# Altium PCB PCB2.PcbDoc
Units mm, origin at the board's own origin, x right, y up, seen from the top; angles counter-clockwise.
Board outline 40 x 45.09 mm, 4 copper layers (Top Layer, GROUND, POWER, Bottom Layer), stack 0.603 mm thick; 37 components, 36 nets, 160 pads, 19 vias.
Unrouted connection lines stored in the file: 3.
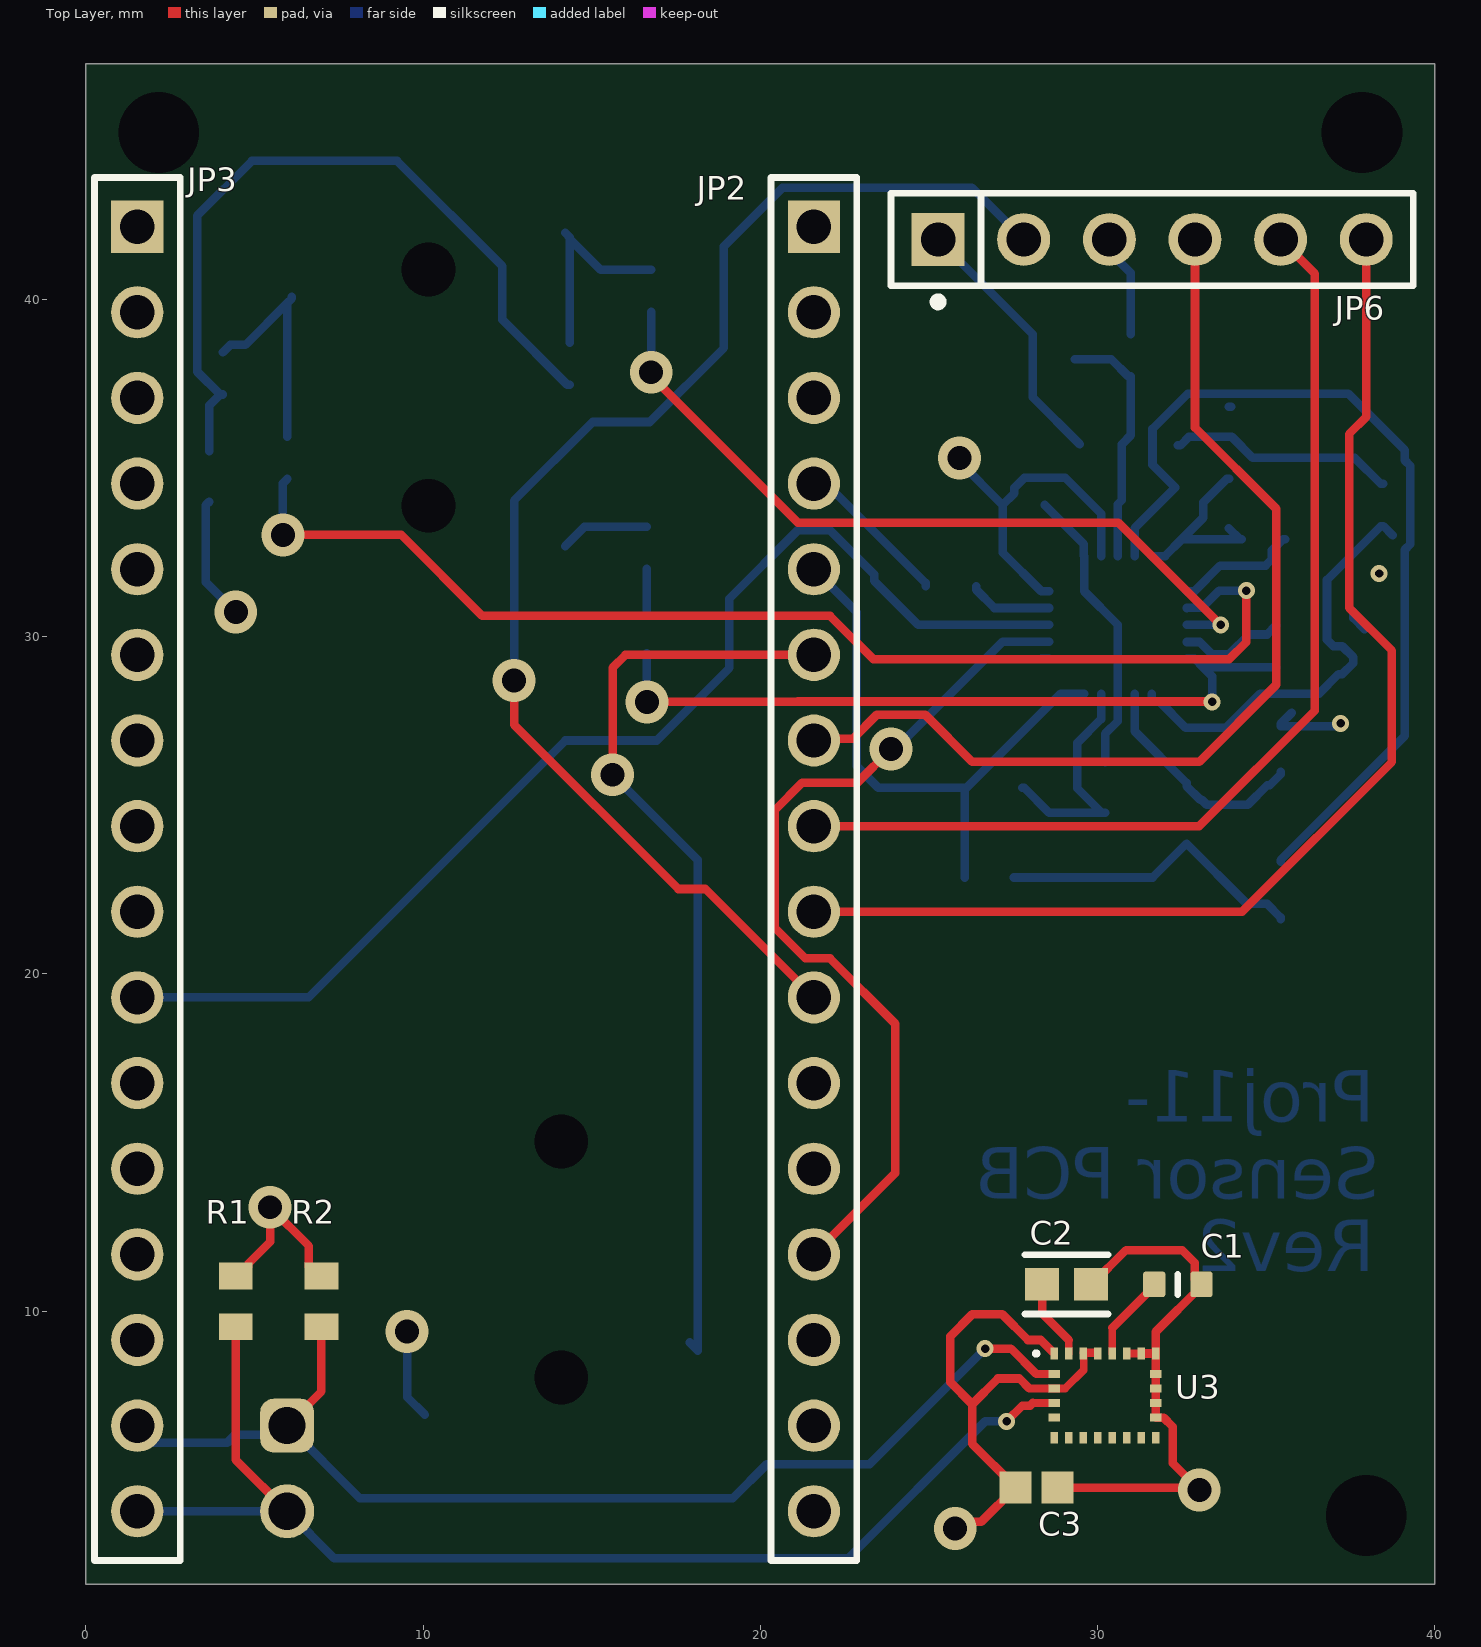
[diagram p0: Top Layer view]
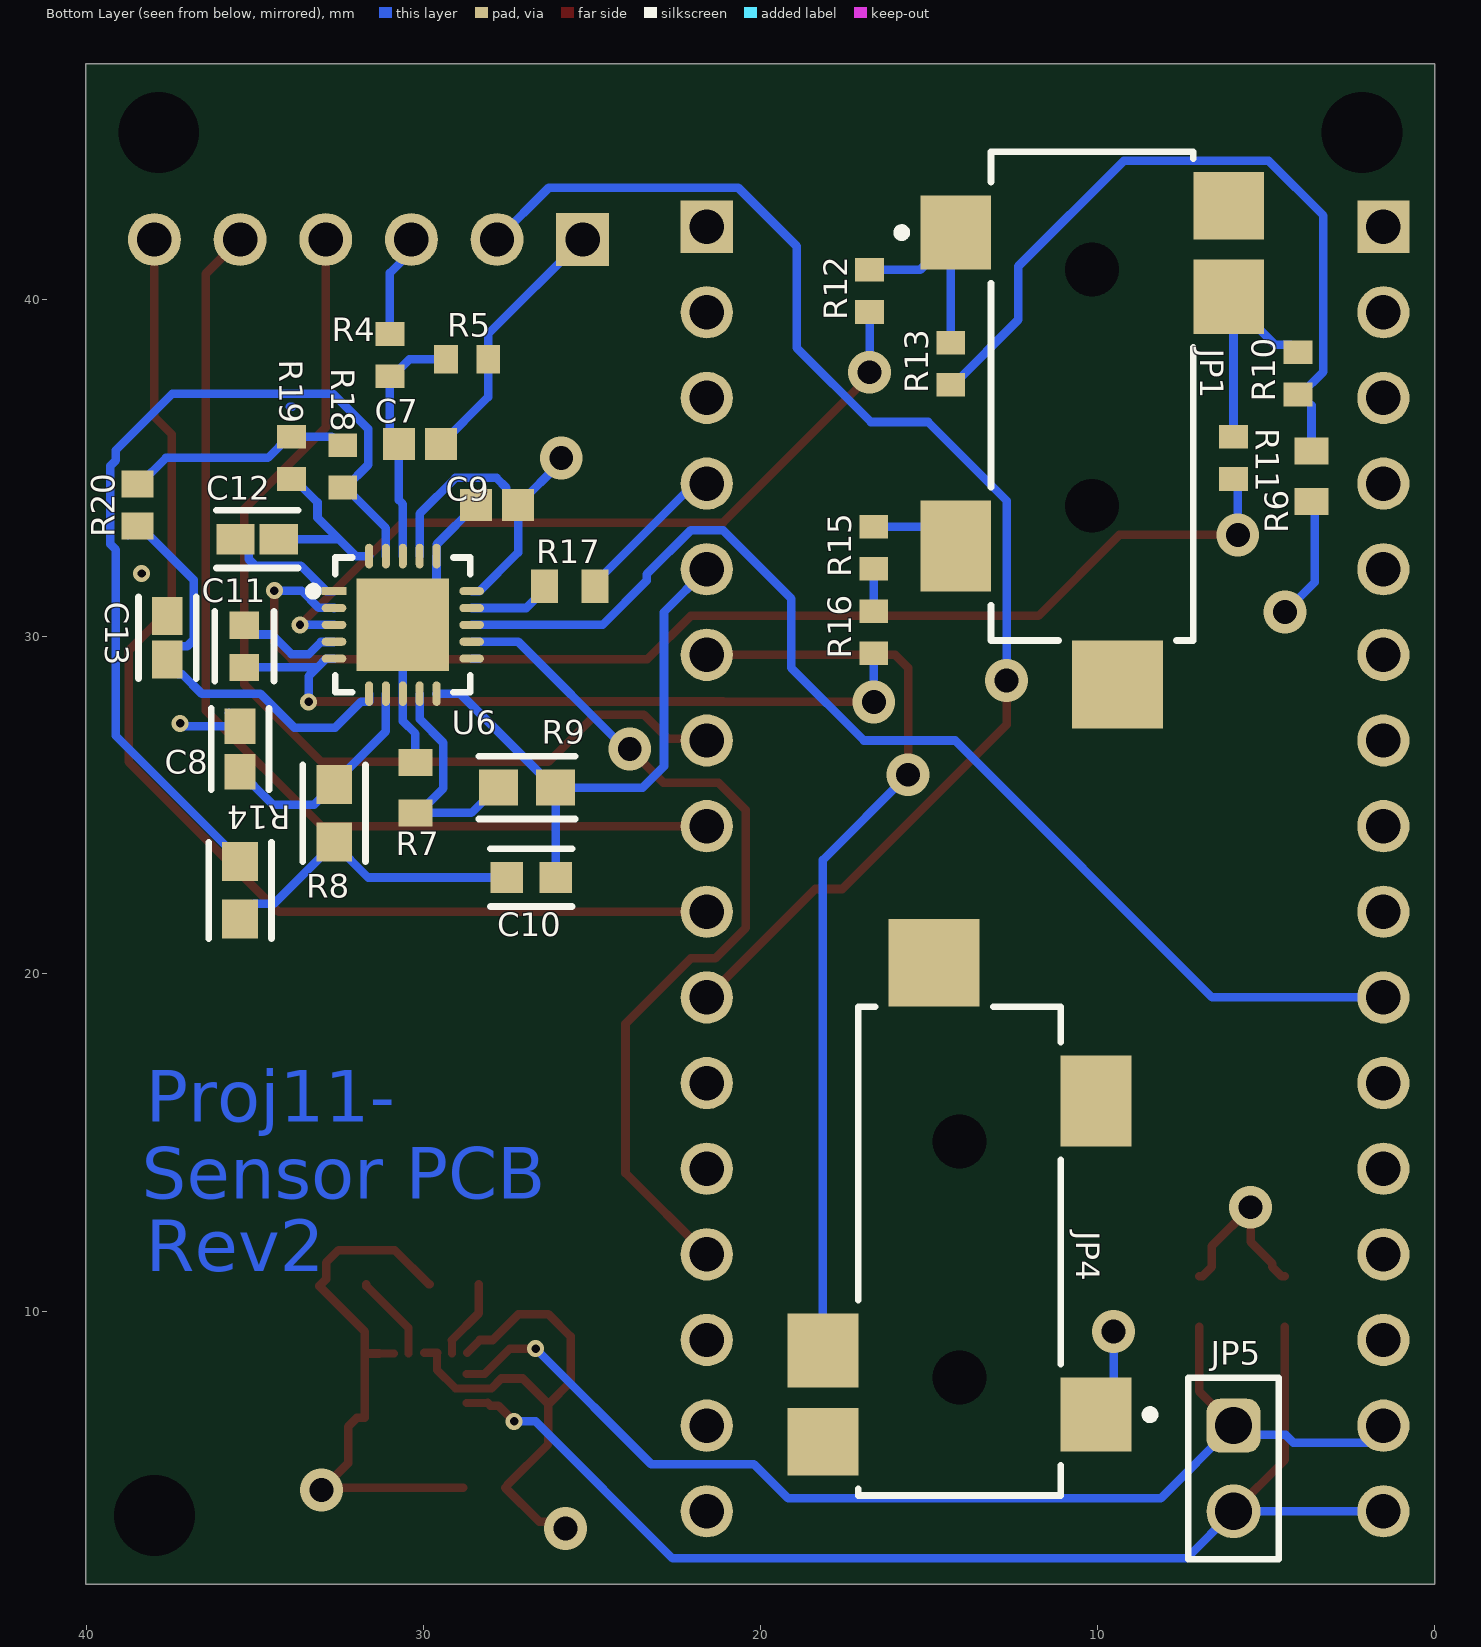
[diagram p1: Bottom Layer view, seen from below]
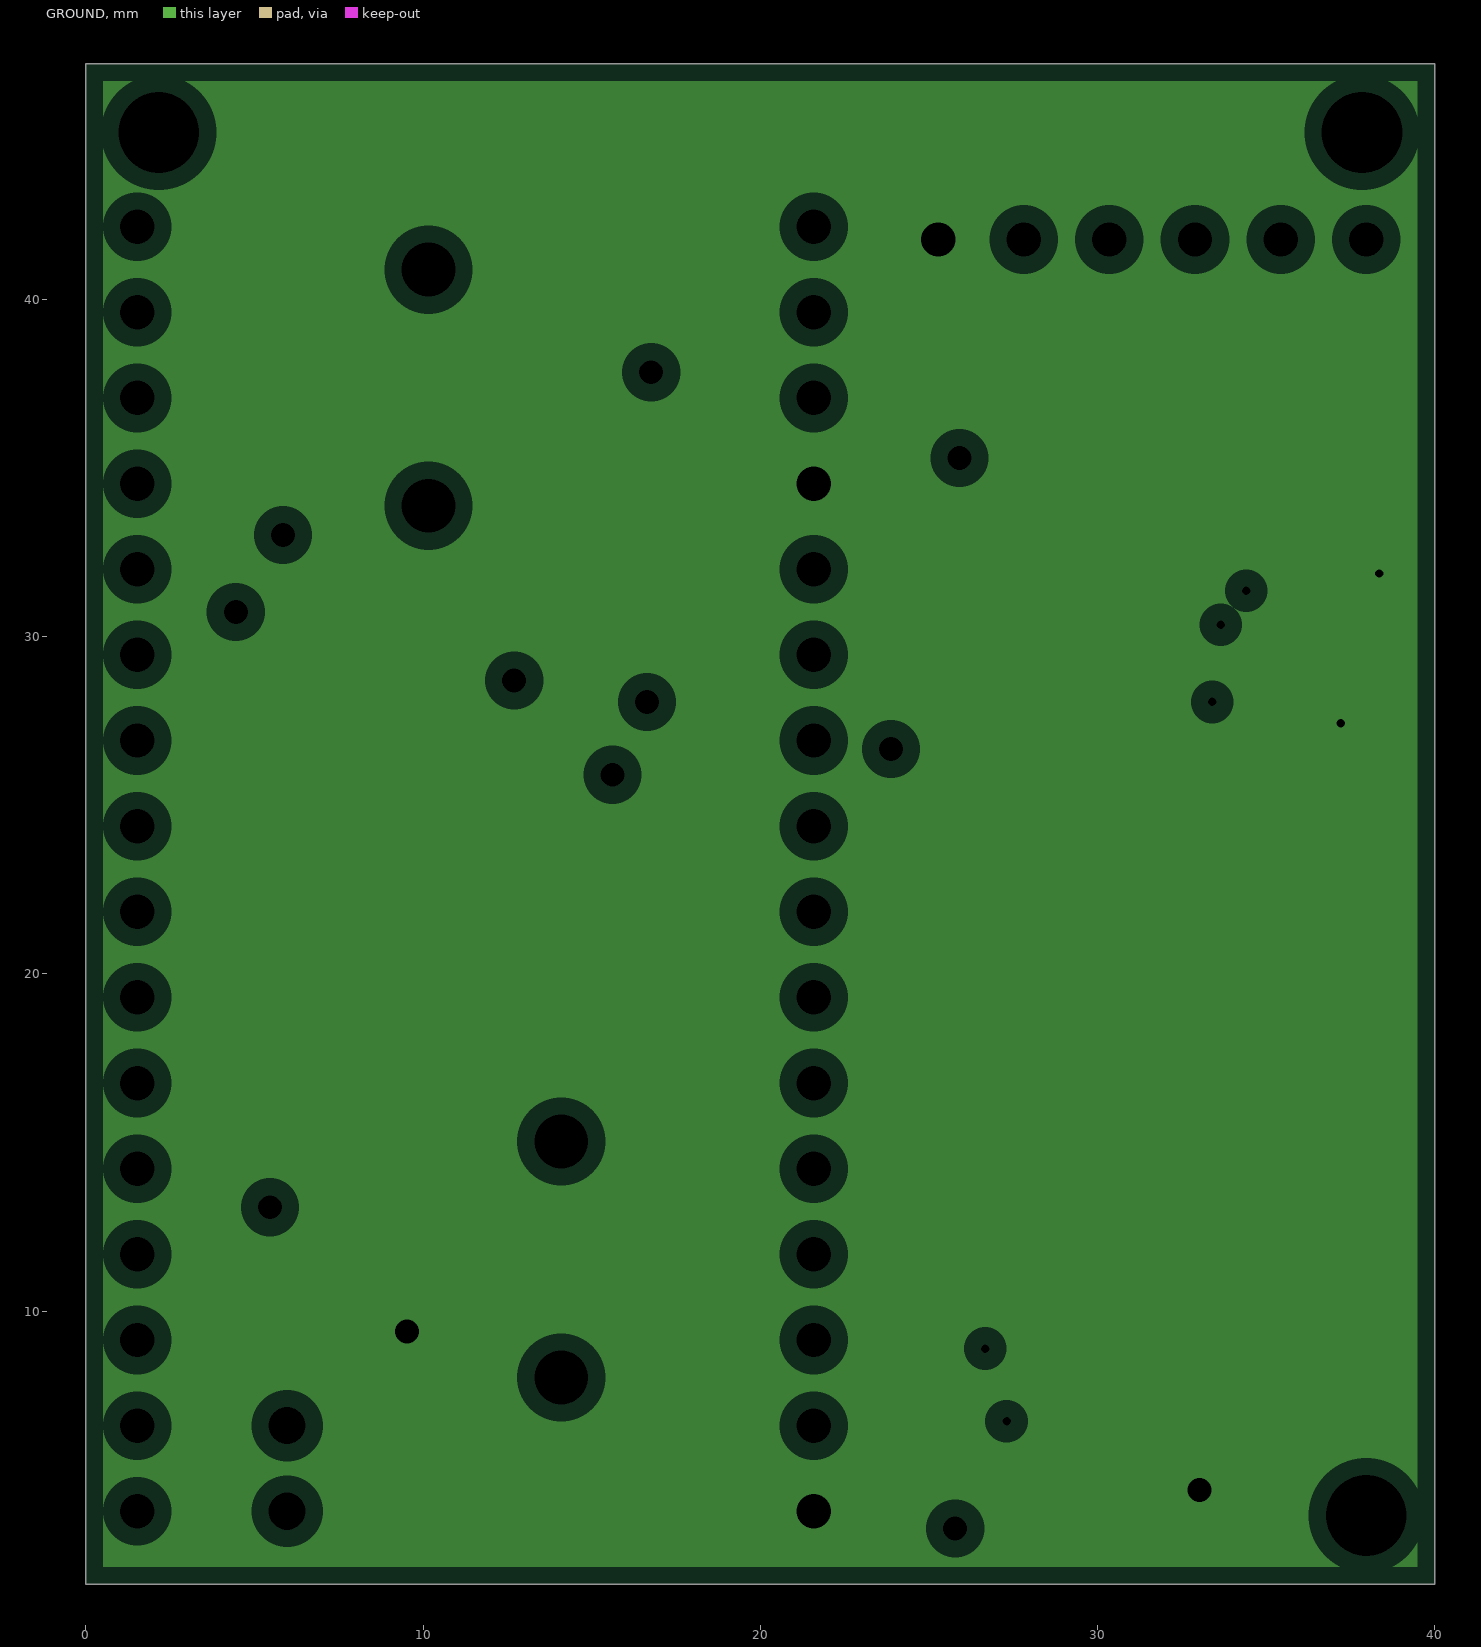
[diagram p2: GROUND, clearances drawn from the general rule]
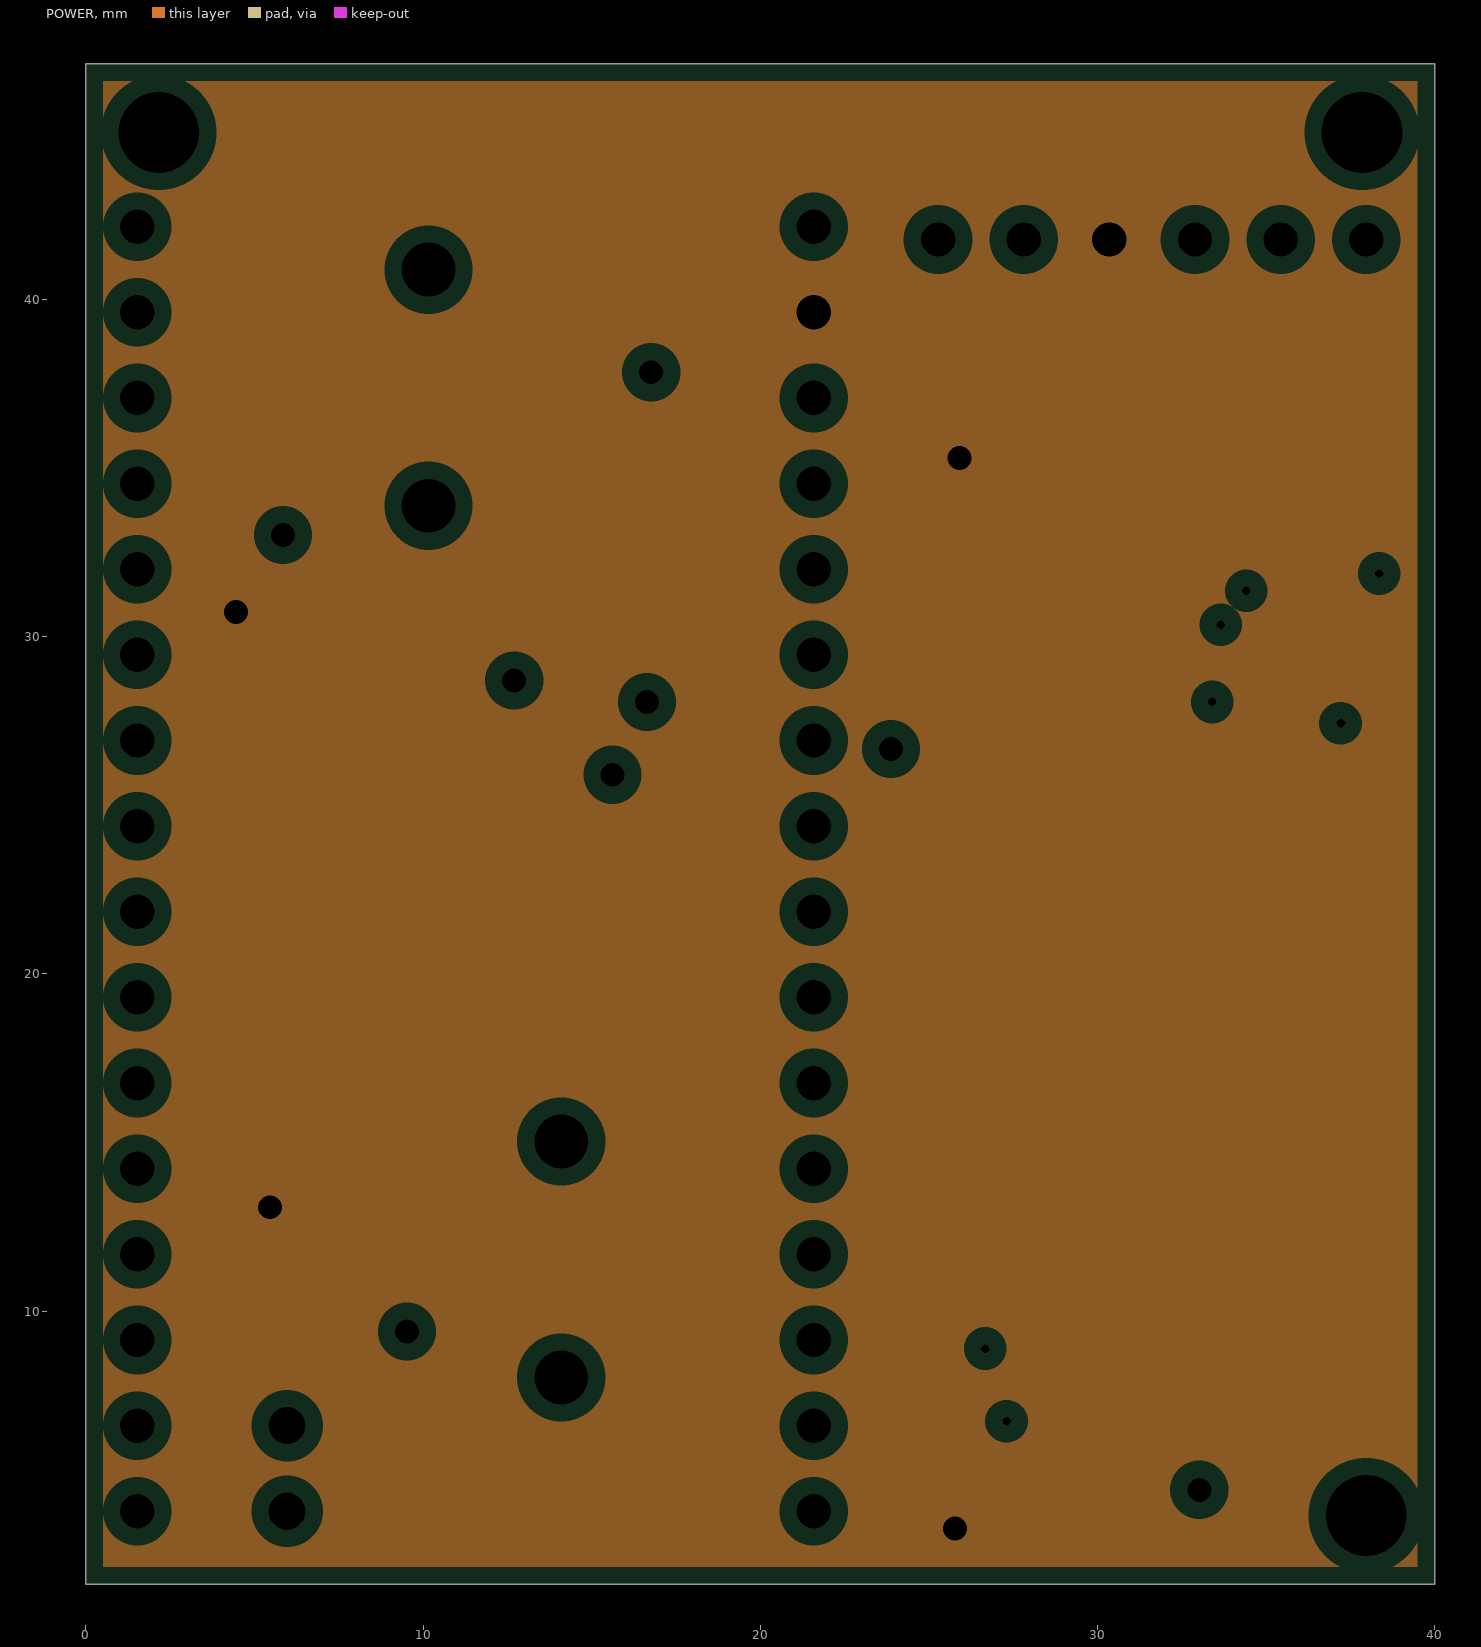
[diagram p3: POWER, clearances drawn from the general rule]
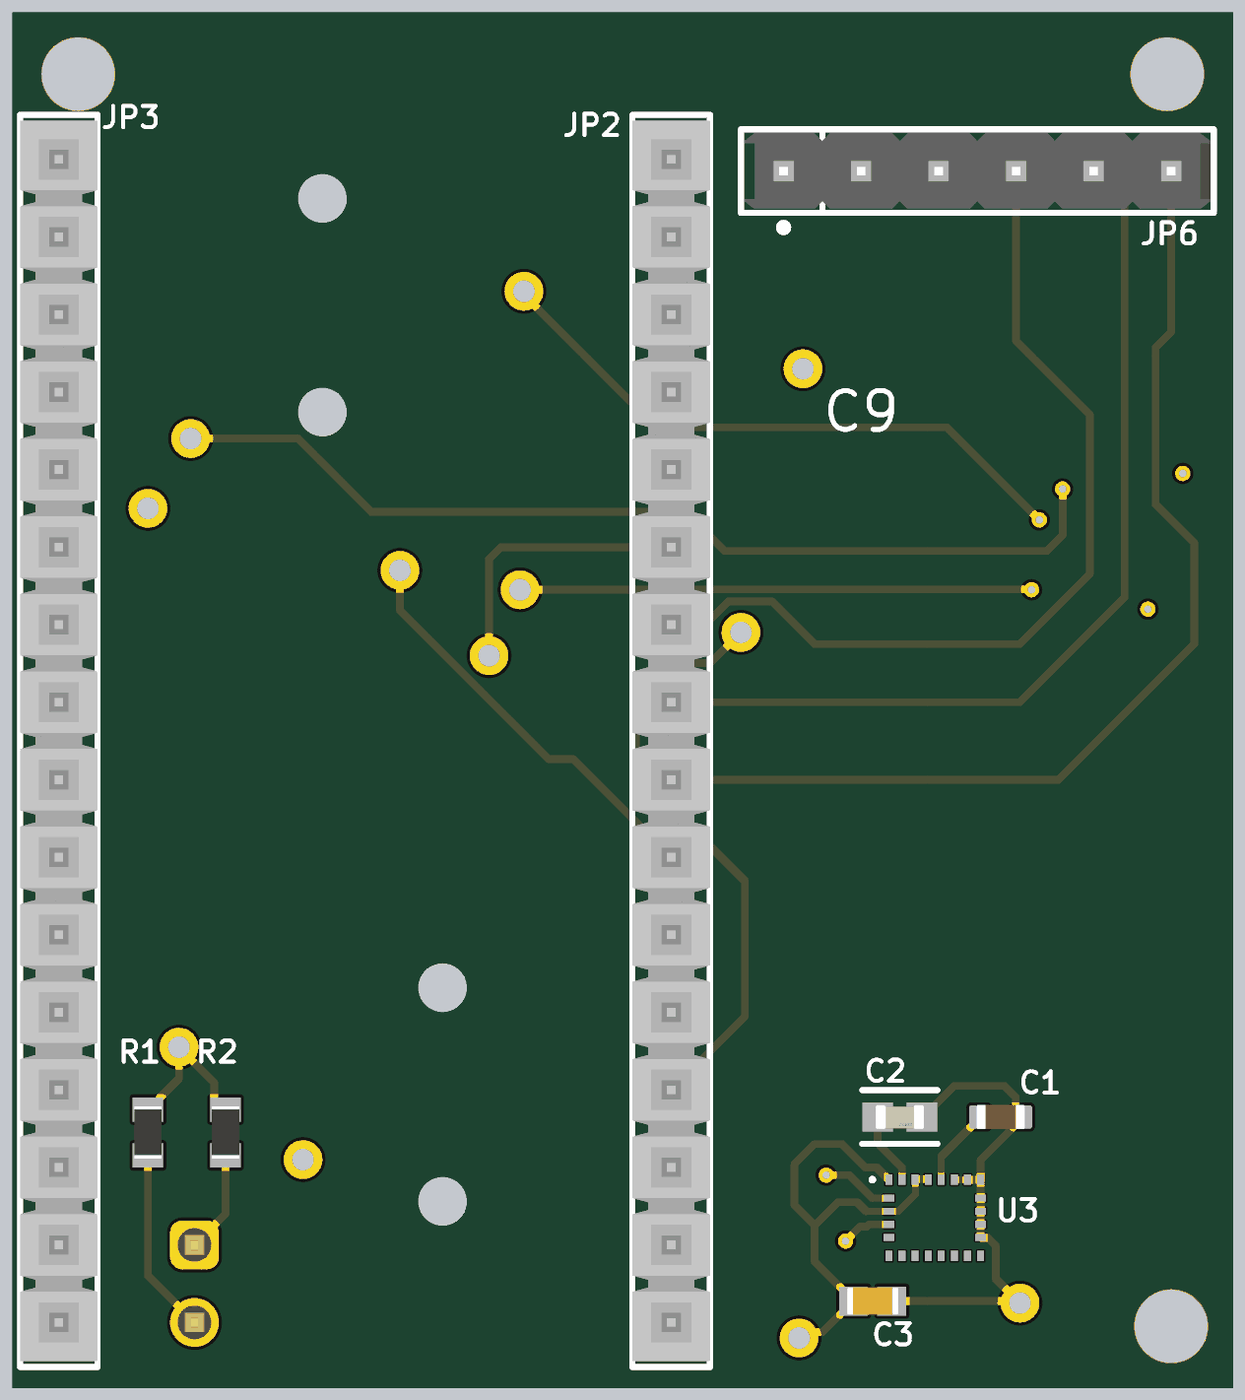
[diagram p4: 3D render of the assembled board from above, using the file's embedded part models]
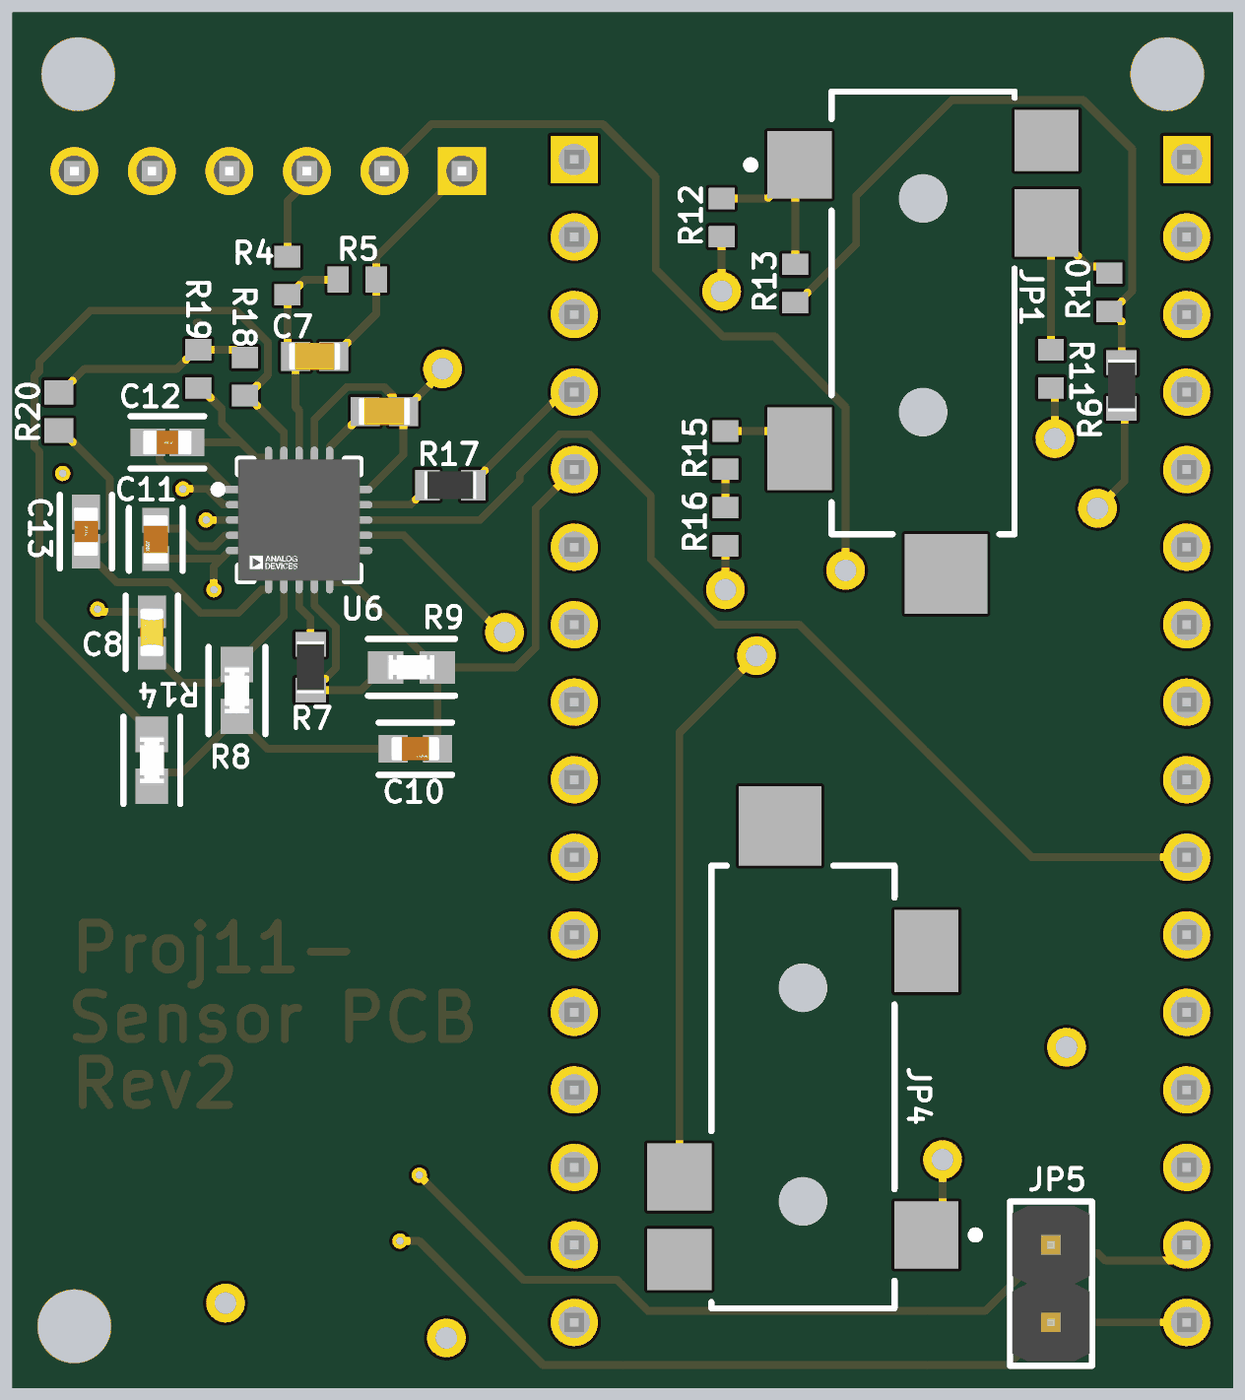
[diagram p5: 3D render of the assembled board from below, using the file's embedded part models]

## Layer stack, top to bottom
Top Solder: solder mask 0.0102, Solder Resist, Dk 3.5
Top Layer: signal copper 0.0356
Dielectric 2: prepreg 0.0711, PP-006, Dk 4.1
GROUND: plane copper 0.035, net GND
Dielectric 1: dielectric 0.32, FR-4, Dk 4.8
POWER: plane copper 0.035, net 3V3
Dielectric 3: prepreg 0.0711, PP-006, Dk 4.1
Bottom Layer: signal copper 0.0356
Bottom Solder: solder mask 0.0102, Solder Resist, Dk 3.5

## Board outline
0,1.905 0,46.99 40.005,46.99 40.005,1.905

## Design rules (kind name [scope] priority, off if disabled: settings)
Clearance Clearance_1 [OnMid vs OnMid] p1: gap=0.254 ignorepadtopadclearanceinfootprint=FALSE except(0.127: SMDPad-SMDPad; 0.14: Arc-Arc Arc-Track Arc-Text Track-Track Track-Text Text-Text; 0.2: Arc-SMDPad Track-SMDPad SMDPad-Text; 0.5: THPad-THPad) sourcerule=37 cellrowname=All cellrowtype=0 cellcolname=All cellcoltype=0 innerlayers=TRUE
Clearance Clearance_2 [(ExistsOnLayer('Top Layer') Or ExistsOnLayer('Bottom Layer')) vs (ExistsOnLayer('Top Layer') Or ExistsOnLayer('Bottom Layer'))] p2: gap=0.254 ignorepadtopadclearanceinfootprint=FALSE except(0.127: SMDPad-SMDPad; 0.14: Arc-Arc Arc-Track Arc-Text Track-Track Track-Text Text-Text; 0.2: Arc-SMDPad Track-SMDPad SMDPad-Text; 0.5: THPad-THPad) sourcerule=37 cellrowname=All cellrowtype=0 cellcolname=All cellcoltype=0 outerlayers=TRUE
Clearance [All] p3: gap=0.254 ignorepadtopadclearanceinfootprint=FALSE ismatrix=TRUE
HoleToHoleClearance [All] p1: gap=0.5 allowstackedmicrovias=TRUE
PlaneClearance [All] p1: clearance=0.508
PlaneConnect [All] p1: planeconnectstyle=Relief reliefexpansion=0.508 reliefentries=4 reliefconductorwidth=0.254 reliefairgap=0.254
PolygonConnect [All] p1: connectstyle=Relief reliefconductorwidth=0.254 reliefentries=4 polygonreliefangle="90 Angle" airgapwidth=0.254
RoutingVias [All] p1: holewidth=0.711 width=1.27 viastyle="Through Hole" minholewidth=0.711 minwidth=1.27 maxholewidth=0.711 maxwidth=1.27
SolderMaskExpansion [All] p1: expansion=0.102 istentingtop=FALSE
Width MaxMinWidth_1 [All] p1: maxlimit=0.254 minlimit=0.09 preferedwidth=0.254 minimp=50.000000 maximp=50.000000 favimp=50.000000
Width [All] p2: maxlimit=0.254 minlimit=0.254 preferedwidth=0.254
27 further rules are at their usual default settings.

## Classes and differential pairs
component class MCU: JP2 JP3 JP5 JP6
component class IMU: C1 C2 C3 JP4 R1 R2 U3
component class ECG: C7 C8 C9 C10 C11 C12 C13 JP1 R4 R5 R6 R7 R8 R9 R10 R11 R12 R13 R14 R15 R16 R17 R18 R19 R20 U6

## Components (designator, comment, footprint, x,y, rotation, side; value= is the part's Value field where it differs from the comment)
C1 "Capacitor 10µF +/-20% 10V 0603" CAPC0603(1608)100_L 32.385,10.795 r0 top value=10µF
C2 "Capacitor 220 nF" FP-C0603C-CF-IPC_B 29.083,10.795 r180 top value=220nF
C3 "Capacitor 100 nF +/-10% 50 V 0603" CAPC1608X90X40NL10T20 28.194,4.764 r0 top value=100nF
C7 "Capacitor 100 nF +/-10% 50 V 0603" CAPC1608X90X40NL10T20 30.099,35.713 r0 bottom value=100nF
C8 "Capacitor 10nF 0603" FP-CC0603-DA-IPC_B 35.433,26.67 r270 bottom value=10nF
C9 "Capacitor 100 nF +/-10% 50 V 0603" CAPC1608X90X40NL10T20 27.813,33.909 r0 bottom value=100nF
C10 "Capacitor 1.5 nF 0603" FP-GRM188-0_1-e0_2_0_5-IPC_B 26.797,22.86 r180 bottom value=1.5nF
C11 "Capacitor 1 nF 0603" FP-0603-L_1_6_0_15-W_0_81-IPC_C 35.306,29.718 r270 bottom value=1nF
C12 "Capacitor .33 uF 0603" FP-C1608-080-0_1-IPC_B 34.925,32.893 r0 bottom value=330nF
C13 "Capacitor .33 uF 0603" FP-C1608-080-0_1-IPC_B 37.592,29.972 r270 bottom value=330nF
JP1 "3.5mm Jack" SWIT-35RASMT4BHNTRX_V 10.16,35.687 r270 bottom
JP2 "MCU row 1" SMTC-TSW-116-08-X-S 21.59,42.164 r270 top
JP3 "MCU row 2" SMTC-TSW-116-08-X-S 1.524,42.164 r270 top
JP4 "3.5mm Jack" SWIT-35RASMT4BHNTRX_V 14.097,13.23 r90 bottom (schematic designator J1)
JP5 "I2C breakouts" 61300211121 5.969,5.334 r270 bottom
JP6 "BLE Breakouts" FP-22-28-4060-MFG 31.623,41.783 r0 top (schematic designator J2)
R1 "Resistor 10k +/-1% 0603 100 mW" RESC1608X55X25ML10T15 4.445,10.287 r270 top value=10k
R2 "Resistor 10k +/-1% 0603 100 mW" RESC1608X55X25ML10T15 6.985,10.287 r270 top value=10k
R4 "Resistor 10M" RESC1608X55X30LL15T15 30.988,38.354 r270 bottom value=10M
R5 "Resistor 10M" RESC1608X55X30LL15T15 28.702,38.226 r0 bottom value=10M
R6 "Resistor 0R +/- 5% 0603 100 mW" RESC1608X55X25ML10T15 3.656,34.756 r270 bottom value=0
R7 "Resistor 100k +/-1% 0603 100 mW" RESC1608X55X25ML10T15 30.232,25.527 r90 bottom value=100k
R8 "Resistor 1M 0603" FP-ERJ3EK-IPC_A 32.643,24.765 r270 bottom value=1M
R9 "Resistor 1M 0603" FP-ERJ3EK-IPC_A 26.924,25.527 r0 bottom value=1M
R10 "Resistor 10M" RESC1608X55X30LL15T15 4.056,37.81 r270 bottom value=10M
R11 "Resistor 180k" RESC1608X55X30LL15T15 5.969,35.306 r270 bottom value=180k
R12 "Resistor 180k" RESC1608X55X30LL15T15 16.764,40.259 r270 bottom value=180k
R13 "Resistor 10M" RESC1608X55X30LL15T15 14.351,38.1 r270 bottom value=10M
R14 "Resistor 1M 0603" FP-ERJ3EK-IPC_A 35.433,22.479 r90 bottom value=1M
R15 "Resistor 180k" RESC1608X55X30LL15T15 16.637,32.639 r270 bottom value=180k
R16 "Resistor 180k" RESC1608X55X30LL15T15 16.637,30.135 r270 bottom value=180k
R17 "Resistor 0R +/- 5% 0603 100 mW" RESC1608X55X25ML10T15 25.654,31.496 r0 bottom value=0
R18 "Resistor 10M" RESC1608X55X30LL15T15 32.385,35.052 r270 bottom value=10M
R19 "Resistor 10M" RESC1608X55X30LL15T15 33.909,35.306 r90 bottom value=10M
R20 "Resistor 1.4M 0603" RESC1609X50X30NL10T20 38.481,33.909 r90 bottom value=1.4M
U3 "LSM9DS1TR" STM-LGA-24_3500X3000X1000 30.226,7.493 r0 top
U6 "AD8232ACPZ-R7" FP-CP-20-8-IPC_C 30.607,30.353 r180 bottom

## Footprints (in the part's own frame and the unit in brackets; to place one, negate y for a bottom-side part, rotate by r counter-clockwise, add the part's x,y. Pads: shape width x height; smd on the part's side, far side on the other; paste and mask are expansions set on the pad)
61300211121 [mm] "Pin Header, pitch 2.54 mm, THT, Vertical, single row, 2p"
  rrect50% 1.6x1.6 hole 1.1: 1(-1.27,0)
  round 1.6 hole 1.1: 2(1.27,0)
  silkscreen extent -2.69,-1.35 2.69,1.35, body extent -2.54,-1.27 2.54,1.27, height 8.57
CAPC0603(1608)100_L [mm] "Chip Capacitor, Body 1.6x0.8mm, Height 1.0mm, IPC High Density"
  rrect25% 0.66x0.76 smd: 1(-0.7,0) 2(0.7,0)
  silkscreen extent 0,-0.3 0,0.3, body extent -0.8,-0.4 0.8,0.4, height 0.95
CAPC1608X90X40NL10T20 [mm] "Chip Capacitor, 2-Leads, Body 1.70x0.90mm, IPC Medium Density"
  rect 0.95x0.95 smd: 1(-0.625,0) 2(0.625,0)
  body extent -0.85,-0.45 0.85,0.45, height 0.9
FP-22-28-4060-MFG [mm]
  rect 1.57x1.57 hole 1.02 paste-2539.97 mask+0: 1(-6.35,0)
  round 1.57 hole 1.02 paste-2539.97 mask+0: 2(-3.81,0) 3(-1.27,0) 4(1.27,0) 5(3.81,0) 6(6.35,0)
  silkscreen extent -7.75,-1.97 7.75,1.37, body extent -7.85,-1.47 7.85,1.47, height 0.25
FP-0603-L_1_6_0_15-W_0_81-IPC_C [mm]
  rect 0.807x0.868 smd paste+0 mask+0: 1(-0.626,0) 2(0.626,0)
  silkscreen extent -1.03,-0.88 1.03,0.88, body extent -0.8,-0.41 0.8,0.41, height 0.9
FP-C0603C-CF-IPC_B [mm]
  rect 1.007x0.958 smd paste+0 mask+0: 1(-0.726,0) 2(0.726,0)
  silkscreen extent -1.23,-0.88 1.23,0.88, body extent -1.48,-0.73 1.48,0.73, height 0.25
FP-C1608-080-0_1-IPC_B [mm]
  rect 1.131x0.912 smd paste+0 mask+0: 1(-0.641,0) 2(0.641,0)
  silkscreen extent -1.21,-0.86 1.21,0.86, body extent -0.8,-0.4 0.8,0.4, height 0.9
FP-CC0603-DA-IPC_B [mm]
  rect 1.058x0.912 smd paste+0 mask+0: 1(-0.677,0) 2(0.677,0)
  silkscreen extent -1.21,-0.86 1.21,0.86, body extent -0.8,-0.4 0.8,0.4, height 0.9
FP-CP-20-8-IPC_C [mm]
  rect 0.731x0.239 smd paste+0 mask+0: 1(-2.041,1)
  rrect100% 0.731x0.239 smd paste+0 mask+0: 2(-2.041,0.5) 3(-2.041,0) 4(-2.041,-0.5) 5(-2.041,-1) 11(2.041,-1) 12(2.041,-0.5) 13(2.041,0) 14(2.041,0.5) 15(2.041,1)
  rrect100% 0.239x0.731 smd paste+0 mask+0: 6(-1,-2.041) 7(-0.5,-2.041) 8(0,-2.041) 9(0.5,-2.041) 10(1,-2.041) 16(1,2.041) 17(0.5,2.041) 18(0,2.041) 19(-0.5,2.041) 20(-1,2.041)
  rect 2.75x2.75 smd paste-1000 mask+0: 21(0,0)
  silkscreen extent -2.78,-2 2,2, body extent -2,-2 2,2, height 0.8
FP-ERJ3EK-IPC_A [mil]
  rect 45.53x41.82 smd paste+0 mask+0: 1(-33.5,0) 2(33.5,0)
  silkscreen extent -56,-37 56,37, body extent -31,-16 31,16, height 22
FP-GRM188-0_1-e0_2_0_5-IPC_B [mm]
  rect 0.959x0.912 smd paste+0 mask+0: 1(-0.727,0) 2(0.727,0)
  silkscreen extent -1.21,-0.86 1.21,0.86, body extent -0.8,-0.4 0.8,0.4, height 0.9
RESC1608X55X25ML10T15 [mm] "Chip Resistor, 2-Leads, Body 1.70x0.90mm, IPC Low Density"
  rect 0.8x1 smd: 1(-0.75,0) 2(0.75,0)
  body extent -0.85,-0.45 0.85,0.45, height 0.55
RESC1608X55X30LL15T15 [mm] "Chip Resistor, 2-Leads, Body 1.60x0.80mm, IPC High Density"
  rect 0.7x0.85 smd: 1(-0.625,0) 2(0.625,0)
  body extent -0.87,-0.48 0.87,0.48, height 0.55
RESC1609X50X30NL10T20 [mm] "Chip Resistor, 2-Leads, Body 1.55x0.85mm, IPC Medium Density"
  rect 0.8x0.95 smd: 1(-0.625,0) 2(0.625,0)
  body extent -0.82,-0.48 0.82,0.48, height 0.5
SMTC-TSW-116-08-X-S [mm] ".025 SQ Post Terminal Strip Assembly, 1x16 Pins, Vertical, 2.54mm Pitch, Male"
  rect 1.55x1.55 hole 1.02: 1(0,0)
  round 1.55 hole 1.02: 2(2.54,0) 3(5.08,0) 4(7.62,0) 5(10.16,0) 6(12.7,0) 7(15.24,0) 8(17.78,0) 9(20.32,0) 10(22.86,0) 11(25.4,0) 12(27.94,0) 13(30.48,0) 14(33.02,0) 15(35.56,0) 16(38.1,0)
  silkscreen extent -1.46,-1.27 39.56,1.27, body extent -1.27,-1.27 39.37,1.27, height 8.38
STM-LGA-24_3500X3000X1000 [mm] "LGA, 24-Leads, Body 3.65x3.15mm, Pitch 0.43mm"
  rect 0.23x0.35 smd mask+0.05: 1(-1.505,1.25) 6(-1.505,-1.25) 7(-1.075,-1.25) 8(-0.645,-1.25) 9(-0.215,-1.25) 10(0.215,-1.25) 11(0.645,-1.25) 12(1.075,-1.25) 13(1.505,-1.25) 18(1.505,1.25) 19(1.075,1.25) 20(0.645,1.25) 21(0.215,1.25) 22(-0.215,1.25) 23(-0.645,1.25) 24(-1.075,1.25)
  rect 0.35x0.23 smd mask+0.05: 2(-1.505,0.645) 3(-1.505,0.215) 4(-1.505,-0.215) 5(-1.505,-0.645) 14(1.505,-0.645) 15(1.505,-0.215) 16(1.505,0.215) 17(1.505,0.645)
  silkscreen extent -2.11,1.19 -1.98,1.31, body extent -1.82,-1.57 1.83,1.58, height 1.03
SWIT-35RASMT4BHNTRX_V [mm] "Jack, 5-Leads, Body 17x6mm"
  rect 2.2x2.1 smd: 1(-6.3,-4.05) 2(-4.4,4.05)
  rect 2.7x2.1 smd: 3(3,-4.05)
  rect 2x2.1 smd: 4(-7.1,4.05)
  rect 2.6x2.7 smd: 5(7.1,0.75)
  rect 0x0 hole 1.6 unplated: MH1(-5.2,0) MH2(1.8,0)
  silkscreen extent -8.7,-5.78 5.8,3, body extent -11.2,-3 5.8,3, height 5

## Part data
C1: library part CMP-001-00075-4, "Chip Capacitor, 10µF +/-20%, 10V, 0603, Thickness 1 mm", Case/Package=0603, Max Operating Temperature=85°C, Min Operating Temperature=-55°C, Tolerance=10%, Voltage Rating=10V, Mounting Technology=SMT, Pins=2
C2: library part CMP-001-00085-1, "Ceramic Capacitor, Multilayer, Ceramic, 25V, 10% +Tol, 10% -Tol, X7R, 15% TC, 0.22uF, Surface Mount, 0603", Capacitor Type=Ceramic, Case/Package=0603, Max Operating Temperature=125°C, Min Operating Temperature=-55°C, Mounting Technology="Surface Mount", Pins=2, RoHS Compliant=Yes
C3 C7 C9: library part CMP-001-00017-6, "Chip Capacitor, 100 nF, +/- 10%, 50 V, 0603 (1608 Metric)", Capacitor Type=Ceramic, Case/Package=0603, Max Operating Temperature=125°C, Min Operating Temperature=-55°C, Tolerance=10%, Voltage Rating=50V, Mounting Technology=SM, Pins=2, RoHS Compliant=True
C8: library part CMP-001-00089-1, "Ceramic Capacitor, Multilayer, Ceramic, 50V, 10% +Tol, 10% -Tol, X7R, 15% TC, 0.01uF, Surface Mount, 0603", Capacitor Type=Ceramic, Case/Package=0603, Max Operating Temperature=125°C, Min Operating Temperature=-55°C, Mounting Technology="Surface Mount", Pins=2, RoHS Compliant=Yes
C10: library part CMP-001-00088-1, "Ceramic Capacitor, Multilayer, Ceramic, 50V, 5% +Tol, 5% -Tol, C0G, 30ppm/Cel TC, 0.0015uF, Surface Mount, 0603", Capacitor Type=Ceramic, Case/Package=0603, Max Operating Temperature=125°C, Min Operating Temperature=-55°C, Mounting Technology="Surface Mount", Pins=2, RoHS Compliant=Yes
C11: library part CMP-001-00087-1, "Ceramic Capacitor, Multilayer, Ceramic, 50V, 10% +Tol, 10% -Tol, X7R, 15% TC, 0.001uF, Surface Mount, 0603", Capacitor Type=Ceramic, Case/Package=0603, Max Operating Temperature=125°C, Min Operating Temperature=-55°C, Mounting Technology="Surface Mount", Pins=2, RoHS Compliant=Yes
C12 C13: library part CMP-001-00086-1, "Ceramic Capacitor, Multilayer, Ceramic, 50V, 10% +Tol, 10% -Tol, X7R, 15% TC, 0.33uF, Surface Mount, 0603", Capacitor Type=Ceramic, Case/Package=0603, Max Operating Temperature=125°C, Min Operating Temperature=-55°C, Mounting Technology="Surface Mount", Pins=2, RoHS Compliant=Yes
JP1 JP4: library part CMP-002-00071-1, "3 Pole(s), Surface Mount Terminal, Jack", Connector Type="AUDIO/RCA CONNECTOR", Mounting Technology=Board, RoHS Compliant=Yes
JP2 JP3: library part CMP-002-00076-1, "Board Connector, 16 Contact(s), 1 Row(s), Male, Straight, 0.1 inch Pitch, Solder Terminal, Black Insulator", Connector Type="BOARD CONNECTOR", Mounting Technology=Board, RoHS Compliant=Yes
JP5: library part CMP-002-00074-2, "Board Connector, 2 Contact(s), 1 Row(s), Male, Straight, 0.1 inch Pitch, Solder Terminal, Locking, Black Insulator, Plug", Max Operating Temperature=125°C, Min Operating Temperature=-40°C, Connector Type="BOARD CONNECTOR", Mounting Technology=Board, RoHS Compliant=Yes
JP6: library part CMP-002-00075-1, "Board Connector, 6 Contact(s), 1 Row(s), Male, Straight, 0.1 inch Pitch, Solder Terminal, Locking, Black Insulator, Receptacle", Connector Type="BOARD CONNECTOR", Mounting Technology=Board, RoHS Compliant=Yes
R1 R2: library part CMP-009-00017-5, "Chip Resistor, 10 KOhm, +/- 1%, 01 W, -55 to 155 degC, 0603 (1608 Metric)", Case/Package=0603, Max Operating Temperature=155°C, Min Operating Temperature=-55°C, Power=100mW, Tolerance=1%, Voltage Rating=50V, Mounting Technology=SM, Pins=2, RoHS Compliant=True
R4 R5 R10 R13 R18 R19: library part CMP-009-00182-1, "Fixed Resistor, Metal Glaze/thick Film, 0.1W, 10000000ohm, 75V, 5% +/-Tol, -400,150ppm/Cel, Surface Mount, 0603", Case/Package=0603, Max Operating Temperature=155°C, Min Operating Temperature=-55°C, Power=100mW, Tolerance=5%, Mounting Technology="Surface Mount", Pins=2, RoHS Compliant=Yes
R6 R17: library part CMP-009-00006-5, "Chip Resistor, 0 Ohm, 0.1 W, -55 to 155 degC, 0603 (1608 Metric)", Case/Package=0603, Max Operating Temperature=155°C, Min Operating Temperature=-55°C, Power=100mW, Tolerance=5%, Voltage Rating=50V, Mounting Technology=SM, Pins=2, RoHS Compliant=True
R7: library part CMP-009-00023-5, "Chip Resistor, 100 KOhm, +/- 1%, 0.1 W, -55 to 155 degC, 0603 (1608 Metric)", Case/Package=0603, Max Operating Temperature=155°C, Min Operating Temperature=-55°C, Power=100mW, Tolerance=1%, Voltage Rating=50V, Mounting Technology=SM, Pins=2, RoHS Compliant=True
R8 R9 R14: library part CMP-009-00185-1, "Fixed Resistor, Metal Glaze/thick Film, 0.1W, 1000000ohm, 75V, 1% +/-Tol, 100ppm/Cel, Surface Mount, 0603", Case/Package=0603, Max Operating Temperature=155°C, Min Operating Temperature=-55°C, Power=100mW, Tolerance=1%, Mounting Technology="Surface Mount", Pins=2, RoHS Compliant=Yes
R11 R12 R15 R16: library part CMP-009-00177-1, "Fixed Resistor, Metal Glaze/thick Film, 0.1W, 180000ohm, 75V, 1% +/-Tol, 100ppm/Cel, Surface Mount, 0603", Case/Package=0603, Max Operating Temperature=155°C, Min Operating Temperature=-55°C, Power=100mW, Tolerance=1%, Mounting Technology="Surface Mount", Pins=2, RoHS Compliant=Yes
R20: library part CMP-009-00184-1, "Fixed Resistor, Metal Glaze/thick Film, 0.1W, 1400000ohm, 75V, 1% +/-Tol, 100ppm/Cel, Surface Mount, 0603", Case/Package=0603, Max Operating Temperature=155°C, Min Operating Temperature=-55°C, Power=100mW, Tolerance=1%, Mounting Technology="Surface Mount", Pins=2, RoHS Compliant=Yes
U3: library part CMP-2000-06606-1, "iNEMO Inertial Module: 3D Accelerometer, 3D Gyroscope, 3D Magnetometer, 1.9 to 3.6 V, -40 to 85 degC, 24-Pin LGA, RoHS, Tape and Reel", Manufacturer=STMicroelectronics, Package Description="24-Pin Plastic Land Grid Array Package, Body 3.65 x 3.15 mm, Pitch 0.43 mm", Package Reference=LGA-24_3500X3000X1000, PartNumber=LSM9DS1, Sensor Case Style=LGA, Supply Voltage Max=3.6V, Supply Voltage Min=1.9V, Acceleration Range=±2g,±4g,±8g,±16g, Datasheet URL=http://www2.st.com/content/ccc/resource/technical/document/datasheet/1e/3f/2a/d6/25/eb/48/46/DM00103319.pdf/files/DM00103319.pdf/jcr:content/translations/en.DM00103319.pdf, Datasheet Version="Rev. 3, 03/2015", Gyroscope Range=±245°/s,±500°/s,±2000°/s, Manufacturer URL=http://www.st.com/, MEMS Module Function=Tri-AxisGyroscope,Tri-AxisAccelerometer,Tri-AxisMagnetometer, Mounting Technology=SurfaceMount, MSL=MSL3-168hours, No. of Pins=24Pins, Packaging=CutTape, Product Range=-, SVHC=NoSVHC(17-Dec-2015)
U6: library part CMP-09085-000003-1, "IC ECG FRONT END 20LFCSP", Case/Package="LFCSP EP", Input Bias Current=50pA, Input Offset Voltage (Vos)=3mV, Max Operating Temperature=85°C, Max Supply Voltage=3.5V, Min Operating Temperature=-40°C, Min Supply Voltage=2V, Nominal Supply Current=170uA, Package Quantity=1500, Power Supply Rejection Ratio (PSRR)=90dB, Common Mode Rejection Ratio=80dB, Contact Plating=Tin, Lead Free="Contains Lead", Mount="Surface Mount", Number of Pins=20, Operating Supply Current=170uA, Packaging="Tape and Reel", REACH SVHC="No SVHC"

## Free pads (board coordinates)
  round 1.524 hole 2.4: 3(2.159,44.958) 3(37.846,44.958) 3(37.973,3.937)

## Via types
v1: diameter 1.27, hole 0.711, Top Layer to Bottom Layer, 12 vias
v2: diameter 0.5, hole 0.25, Top Layer to Bottom Layer, 7 vias

## Nets (pads, with @x,y where several pads share a name; then routed paths per layer and width w, separated by ;. In a path a pad name is that pad's centre, name@x,y a point inside that pad or via, vN(x,y) a via of type N, cw(c..) or ccw(c..) an arc to the next point about the centre after c; other vN are vias at no path point)
1V8: JP2.3
3V3: C3.1 C9.1 JP2.2 JP6.3 R1.1 R2.1 R4.1 R6.2 U3.1 U3.3 U3.22 U3.23 U6.15 U6.17 | length 38.4
  Top Layer w0.23: 27.979,7.708 U3.3 29.044,7.708 29.591,8.255 U3.23@29.591,8.733
  Top Layer w0.254: R1.1 4.545,11.037 4.818,11.31 4.818,11.41 5.461,12.053 v1(5.461,13.081) 6.612,11.93 6.612,11.31 6.885,11.037 R2.1 ; v1(25.781,3.556) 25.975,3.75 26.556,3.75 C3.1 ; C3.1@27.515,4.837 26.289,6.063 26.289,7.239 ; 27.979,7.708 27.686,8.001 27.051,8.001 26.289,7.239 ; U3.1@28.702,8.763 28.32,9.144 27.94,9.144 27.178,9.906 26.289,9.906 25.632,9.249 25.632,7.896 26.289,7.239 ; U3.23@29.593,8.763 U3.22@29.972,8.763
  Bottom Layer w0.254: R6.2 3.556,33.906 3.556,31.623 v1(4.445,30.734) ; v1(25.908,35.306) 25.908,35.189 C9.1 ; U6.15 28.335,31.353 27.188,32.5 C9.1 ; U6.17 30.107,33.652 29.048,34.711 27.828,34.711 27.536,34.419 27.536,34.257 C9.1 ; JP6.3 30.353,41.427 30.988,40.792 R4.1
GND: C1.2 C2.1 C3.2 C7.1 C8.1 C9.2 C13.1 JP2.4 JP2.16 JP4.1 JP6.1 R5.1 R7.2 R17.1 U3.14 U3.15 U3.16 U3.17 U3.18 U3.19 U3.20 U6.8 U6.16 U6.21 | length 43.5
  Top Layer w0.23: U3.20 U3.19
  Top Layer w0.254: C3.2 v1@32.955,4.764 ; C2.1 29.833,10.795 30.849,11.811 32.512,11.811 32.882,11.441 32.882,10.948 33.085,10.745 31.731,9.391 U3.18 ; U3.19 U3.18 ; v1(33.02,4.699) v1@32.955,4.764 ; U3.18 U3.17 U3.16 U3.15 U3.14 31.743,6.836 31.967,6.836 32.227,6.576 32.227,5.492 v1@32.955,4.764
  Bottom Layer w0.254: v1(9.525,9.398) 9.525,7.452 JP4.1 ; JP2.4 21.838,34.296 22.204,34.296 24.904,31.596 R17.1 ; JP6.1 28.077,38.979 R5.1 28.077,37.11 C7.1 ; C9.2 29.6,32.747 29.6,32.401 U6.16 29.607,31.353 U6.21 U6.8 30.607,27.503 30.232,27.128 R7.2 ; C8.1@35.762,27.749 35.433,27.42 C8.1 37.059,27.347 37.144,27.432 v2(37.211,27.432) ; C13.1@37.592,30.722 C13.1 37.592,30.553 C13.1@37.921,30.224
  other v2: 38.354,31.877
NetC1_1: C1.1 U3.21 | length 2.6
  Top Layer w0.23: U3.21 30.441,9.501
  Top Layer w0.254: 30.441,9.501 31.685,10.745 C1.1
NetC2_2: C2.2 U3.24 | length 2.4
  Top Layer w0.23: U3.24 29.151,9.141
  Top Layer w0.254: C2.2 28.357,9.935 29.151,9.141
NetC7_2: C7.2 R4.2 R5.2 U6.18 | length 7.4
  Bottom Layer w0.254: R5.2 30.416,38.226 30.913,37.729 R4.2 30.988,35.977 C7.2 30.724,34.054 30.607,33.937 U6.18
NetC8_2: C8.2 R8.1 U6.7 | length 6.8
  Bottom Layer w0.254: U6.7 31.107,27.199 32.643,25.663 R8.1 32.643,25.569 33.047,25.165 33.094,25.165 33.24,25.019 34.459,25.019 35.031,25.591 35.104,25.591 35.433,25.92 C8.2
NetC10_1: C10.1 R8.2 R14.1 | length 9.3
  Bottom Layer w0.254: C10.1 31.636,22.86 32.643,23.867 34.43,22.079 35.029,22.079 35.433,21.675 R14.1
NetC10_2: C10.2 JP2.5 R9.1 U6.10 | length 17.2
  Bottom Layer w0.254: JP2.5 22.86,30.734 22.86,26.162 23.498,25.524 R9.1@26.07,25.524 ; C10.2 R9.1@26.07,25.524 ; U6.10 28.905,28.312 26.117,25.524 R9.1@26.07,25.524
NetC11_1: C11.1 U6.4 | length 3.2
  Bottom Layer w0.254: U6.4 32.655,29.846 33.033,29.846 33.392,29.486 33.909,29.486 34.49,30.068 35.03,30.068 C11.1
NetC11_2: C11.2 R16.2 U6.5 | length 22.1
  Top Layer w0.254: v1(16.637,28.067) 21.098,28.067 21.111,28.08 33.388,28.08 v2(33.401,28.067)
  Bottom Layer w0.254: v1(16.637,28.067) R16.2 ; U6.5 32.879,29.353 33.14,29.092 ; v2(33.401,28.067) 33.401,28.831 33.14,29.092 ; C11.2 33.14,29.092
NetC12_1: C12.1 R19.1 U6.20 | length 5.8
  Bottom Layer w0.254: U6.20 32.003,32.394 32.502,32.893 ; C12.1@33.889,33.222 C12.1@34.218,32.893 ; R19.1 33.834,34.681 33.137,33.984 33.137,33.528 32.502,32.893 ; C12.1 C12.1@34.218,32.893 ; 32.502,32.893 C12.1@34.218,32.893
NetC12_2: C12.2 U6.1 | length 3.7
  Bottom Layer w0.254: U6.1 32.879,31.353 33.636,32.11 34.985,32.11 35.177,32.301 35.177,32.564 35.506,32.893 C12.2
NetC13_2: C13.2 R20.1 U6.6 | length 13
  Bottom Layer w0.254: U6.6 31.607,28.081 31.614,28.073 31.846,28.073 32.614,27.305 33.823,27.305 34.83,28.312 36.573,28.312 37.153,28.893 37.263,28.893 37.592,29.222 C13.2 37.592,29.391 37.263,29.72 37,29.72 36.809,29.912 36.809,31.687 38.406,33.284 R20.1 R20.1@38.754,33.011
NetJP1_1: JP1.1 R12.1 R13.1 | length 6.1
  Bottom Layer w0.254: JP1.1 14.351,41.846 JP1.1@14.351,41.796 ; R13.1 JP1.1@14.351,41.796 ; R12.1 15.263,40.884 JP1.1@14.351,41.796
NetJP1_2: JP1.2 R10.1 R11.1 | length 6.7
  Bottom Layer w0.254: R10.1 4.279,38.658 4.731,38.658 JP1.2@5.969,39.896 ; R11.1 JP1.2@5.969,39.896 ; JP1.2 6.11,40.037 JP1.2@5.969,39.896
NetJP1_3: JP1.3 R15.1 | length 2.7
  Bottom Layer w0.254: JP1.3 14.787,33.264 R15.1
NetJP2_6: JP2.6 JP4.2 | length 27.8
  Top Layer w0.254: v1(15.621,25.908) 15.621,29.083 16.002,29.464 JP2.6
  Bottom Layer w0.254: v1(15.621,25.908) 18.147,23.382 JP4.2 JP4.2@17.907,9.07
NetJP2_7: JP2.7 JP6.4 | length 29.8
  Top Layer w0.254: JP2.7 21.643,26.977 22.746,26.977 23.455,27.686 24.892,27.686 26.289,26.289 33.02,26.289 35.306,28.575 35.306,33.794 32.893,36.207 JP6.4
NetJP2_8: JP2.8 JP6.5 | length 30.7
  Top Layer w0.254: JP2.8 33.02,24.384 36.449,27.813 36.449,40.767 JP6.5
NetJP2_9: JP2.9 JP6.6 | length 35.2
  Top Layer w0.254: JP2.9 34.29,21.844 38.735,26.289 38.735,29.591 37.465,30.861 37.465,36.012 37.973,36.52 JP6.6
NetJP2_10: JP2.10 JP6.2 | length 40.2
  Top Layer w0.254: v1(12.7,28.702) 12.7,27.392 17.573,22.52 18.374,22.52 JP2.10
  Bottom Layer w0.254: v1(12.7,28.702) 12.7,34.039 15.03,36.369 16.724,36.369 18.921,38.566 18.921,41.584 20.657,43.32 26.276,43.32 JP6.2
NetJP2_13: JP2.13 U6.12 | length 26.6
  Top Layer w0.254: JP2.13@21.342,11.932 JP2.13 24.003,14.097 24.003,18.526 22.069,20.46 21.339,20.46 20.434,21.365 20.434,24.863 21.24,25.669 22.875,25.669 v1(23.876,26.67)
  Bottom Layer w0.254: v1(23.876,26.67) 24.003,26.67 27.186,29.853 U6.12
NetJP3_6: JP3.6
NetJP3_10: JP3.10 U6.13 | length 35.3
  Bottom Layer w0.254: JP3.10 6.604,19.304 14.224,26.924 16.931,26.924 19.085,29.078 19.085,31.133 21.111,33.16 22.069,33.16 23.377,31.852 23.377,31.661 24.685,30.353 U6.13
NetJP3_15: JP3.15 JP5.1 R2.2 U3.2 | length 33.8
  Top Layer w0.23: 28.184,8.138 U3.2
  Top Layer w0.254: JP5.1 6.985,7.62 R2.2 ; v2(26.67,8.89) 27.432,8.89 28.184,8.138
  Bottom Layer w0.254: JP3.15@1.524,6.155 1.583,6.096 4.191,6.096 4.426,6.331 5.696,6.331 JP5.1 8.128,4.445 19.177,4.445 20.193,5.461 23.241,5.461 v2(26.67,8.89)
NetJP3_16: JP3.16 JP5.2 R1.2 U3.4 | length 35.8
  Top Layer w0.23: 28.084,7.278 U3.4
  Top Layer w0.254: R1.2 4.445,5.588 JP5.2 ; v2(27.305,6.731) 27.774,7.2 28.006,7.2 28.084,7.278
  Bottom Layer w0.254: JP3.16 JP5.2 7.366,2.667 22.606,2.667 26.67,6.731 v2(27.305,6.731)
NetR6_1: R6.1 R10.2 R13.2 | length 22.9
  Bottom Layer w0.254: R6.1 3.656,36.86 R10.2@3.981,37.185 ; R10.2 R10.2@3.981,37.185 ; R13.2 14.276,37.475 12.351,39.4 12.351,40.989 9.226,44.114 4.925,44.114 3.304,42.493 3.304,37.862 R10.2@3.981,37.185
NetR7_1: R7.1 R9.2 U6.9 | length 6.9
  Bottom Layer w0.254: R9.2 27.822,25.527 28.572,24.777 R7.1@30.132,24.777 ; U6.9 30.107,27.56 29.405,26.858 29.405,25.504 R7.1@30.132,24.777 ; R7.1 R7.1@30.132,24.777
NetR11_2: R11.2 U6.2 | length 35.5
  Top Layer w0.254: v1(5.842,33.02) 9.357,33.02 11.757,30.62 22.069,30.62 23.352,29.337 33.909,29.337 34.417,29.845 v2(34.417,31.369)
  Bottom Layer w0.254: v1(5.842,33.02) 5.842,34.554 R11.2 ; U6.2 32.655,30.86 33.103,30.86 33.612,31.369 v2(34.417,31.369)
NetR12_2: R12.2 U6.3 | length 22.9
  Top Layer w0.254: v1(16.764,37.846) 16.764,37.735 21.111,33.388 30.62,33.388 v2(33.655,30.353)
  Bottom Layer w0.254: v1(16.764,37.846) R12.2 ; U6.3 v2(33.655,30.353)
NetR14_2: R14.2 R18.2 U6.19 | length 27
  Bottom Layer w0.254: U6.19 31.107,33.224 32.31,34.427 31.633,35.104 31.633,36.162 32.685,37.214 37.44,37.214 39.116,35.538 39.116,35.236 39.283,35.069 39.283,32.749 39.116,32.582 39.116,27.06 35.433,23.377 R14.2
NetR15_2: R15.2 R16.1 | length 1.3
  Bottom Layer w0.254: R16.1 R15.2
NetR17_2: R17.2 U6.14 | length 2.5
  Bottom Layer w0.254: R17.2 26.404,31.396 26.947,30.853 U6.14
NetR18_1: R18.1 R19.2 R20.2 | length 6.9
  Bottom Layer w0.254: R18.1 32.46,35.677 32.714,35.931 R19.2 33.984,35.931 34.609,35.306 37.634,35.306 38.406,34.534 R20.2 ; 33.889,36.82 33.964,36.82
NetU6_11: U6.11 | length 0.2
  Bottom Layer w0.254: U6.11@28.335,29.353 U6.11
pads on no net: JP1.4 JP1.5 JP1.MH1 JP1.MH2 JP2.1 JP2.11 JP2.12 JP2.14 JP2.15 JP3.1 JP3.2 JP3.3 JP3.4 JP3.5 JP3.7 JP3.8 JP3.9 JP3.11 JP3.12 JP3.13 JP3.14 JP4.3 JP4.4 JP4.5 JP4.MH1 JP4.MH2 U3.5 U3.6 U3.7 U3.8 U3.9 U3.10 U3.11 U3.12 U3.13

## Polygon pours and split planes (outlines as drawn)
GND on GROUND (split plane): 39.495,2.415 0.51,2.415 0.51,46.48 39.495,46.48
3V3 on POWER (split plane): 39.495,2.415 0.51,2.415 0.51,46.48 39.495,46.48

## Other copper
Bottom Layer:
  text "Proj11-" at 38.227,15.621 h1.52
  text "Sensor PCB" at 38.354,13.335 h1.52
  text "Rev2" at 38.227,11.176 h1.52